# Altium PCB DC_DC.PcbDoc
Units mm, origin at the board's own origin, x right, y up, seen from the top; angles counter-clockwise.
Board outline 97.66 x 51.56 mm, 2 copper layers (Top Layer, Bottom Layer); 23 components, 9 nets, 55 pads, 2 vias.
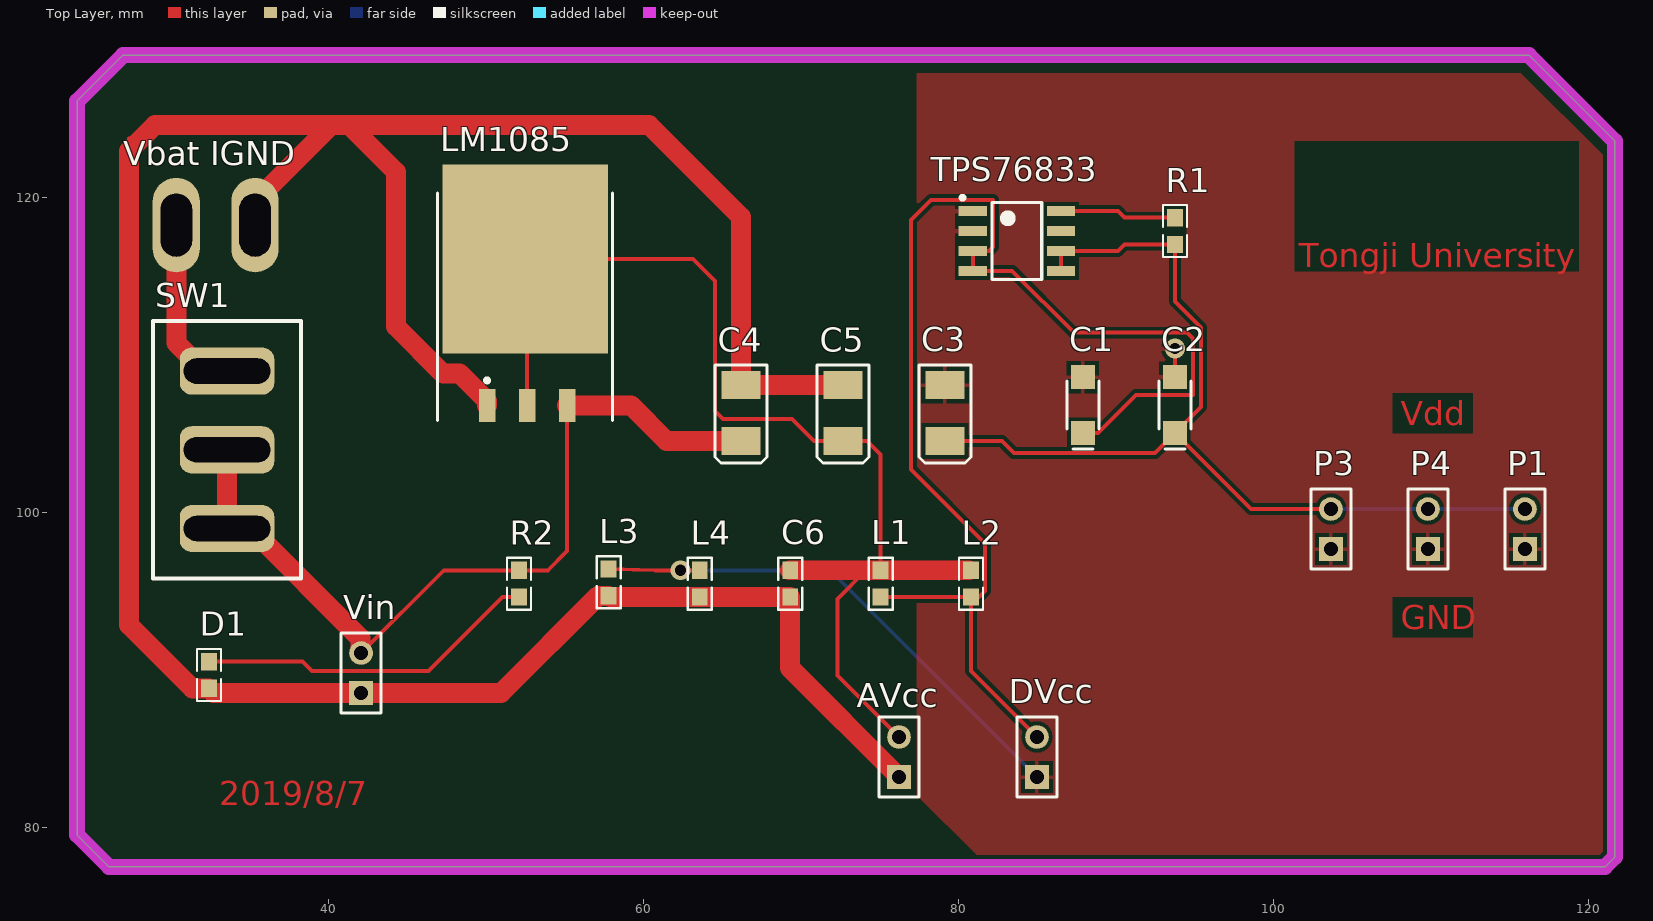
[diagram p0: Top Layer view]
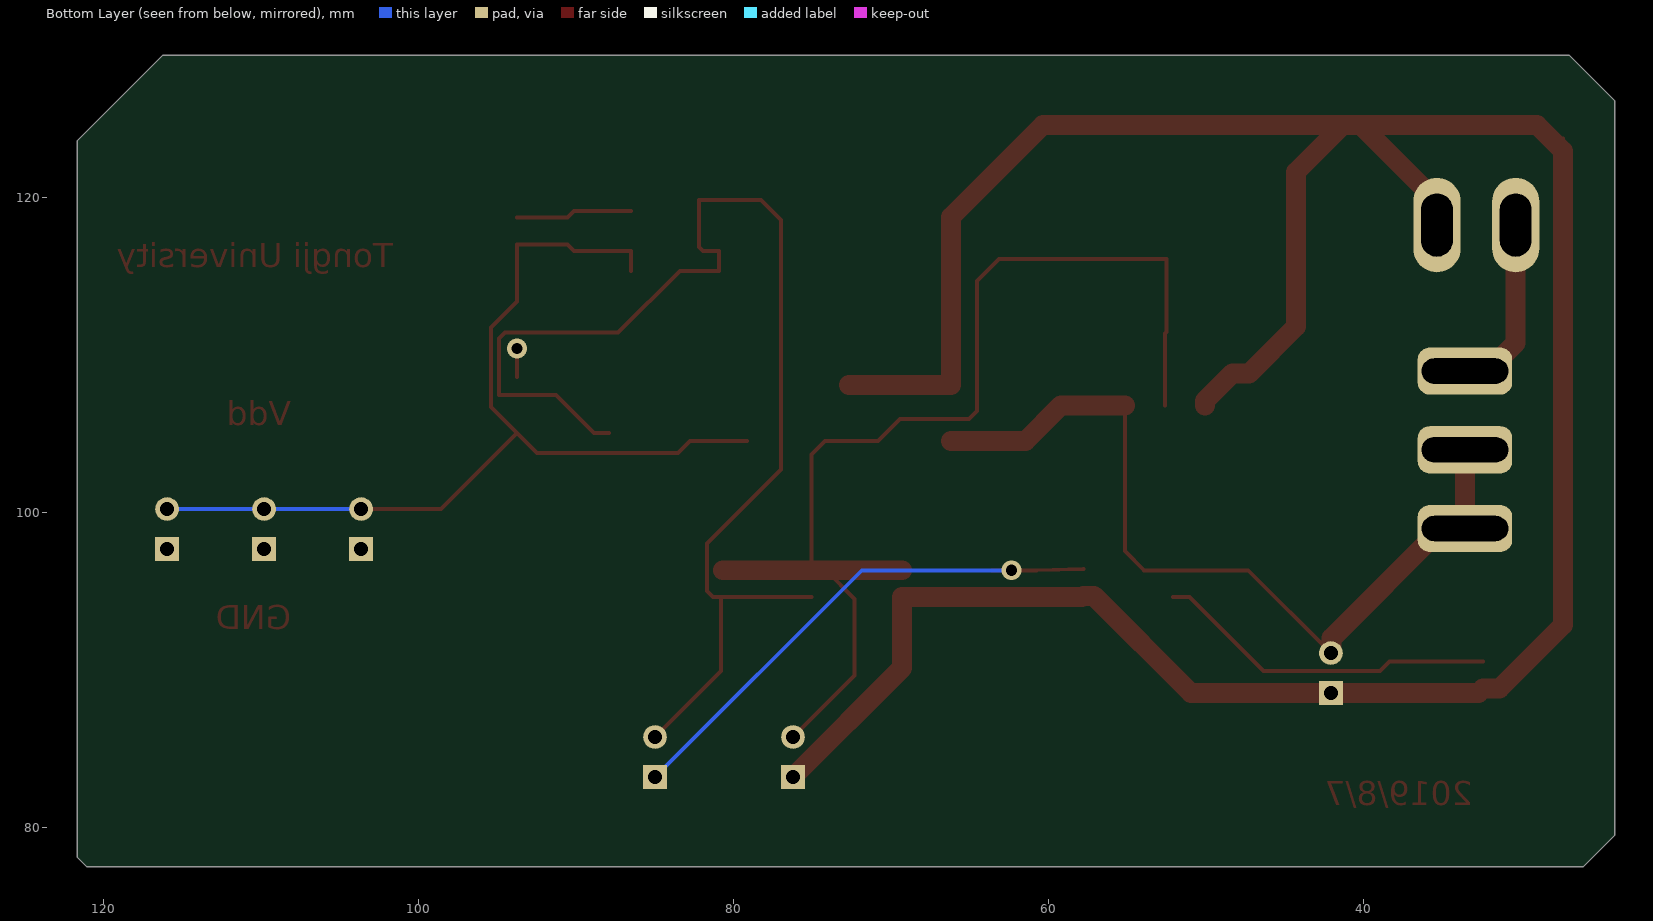
[diagram p1: Bottom Layer view, seen from below]

## Layer stack, top to bottom
Top Solder: solder mask 0.0102, Solder Resist, Dk 3.5
Top Layer: signal copper 0.0356
Dielectric 1: dielectric 0.32, FR-4, Dk 4.8
Bottom Layer: signal copper 0.0356
Bottom Solder: solder mask 0.0102, Solder Resist, Dk 3.5

## Board outline
26.035,77.47 24.003,79.502 24.003,126.111 26.924,129.032 116.205,129.032 121.666,123.571 121.666,78.105 121.031,77.47

## Design rules (kind name [scope] priority, off if disabled: settings)
Clearance [All] p1: gap=0.254 ignorepadtopadclearanceinfootprint=FALSE except(0: Arc-Hole Track-Hole SMDPad-Hole THPad-Hole Via-Hole Fill-Hole Poly-Hole Region-Hole Text-Hole)
PolygonConnect [All] p1: connectstyle=Relief reliefconductorwidth=0.254 reliefentries=4 polygonreliefangle="90 Angle" airgapwidth=0.254
RoutingVias [All] p1: holewidth=0.711 width=1.27 viastyle="Through Hole" minholewidth=0.711 minwidth=1.27 maxholewidth=0.711 maxwidth=1.27
SolderMaskExpansion [All] p1: expansion=0.102
Width [All] p1: maxlimit=2.54 minlimit=0.254 preferedwidth=0.254
30 further rules are at their usual default settings.

## Components (designator, comment, footprint, x,y, rotation, side; value= is the part's Value field where it differs from the comment)
AVcc "Analog" HDR1X2 76.2,83.185 r90 top (schematic designator P6)
C1 "10uF/16V" CAP-1206 87.884,106.805 r90 top value=10uF
C2 "0.1uF/16V" CAP-1206 93.726,106.805 r90 top value=0.1uF
C3 "CT-22uF/16V" CAP-3528 79.121,106.299 r90 top
C4 "CT-22uF/16V" CAP-3528 66.167,106.299 r90 top
C5 "CT-22uF/16V" CAP-3528 72.644,106.299 r90 top
C6 "C-0.1uF/16V" 0603-1 69.291,95.465 r90 top value=100nF
D1 "D-LED" 0603-1 32.385,89.662 r270 top
DVcc "Digital" HDR1X2 84.963,83.185 r90 top (schematic designator P5)
L1 "L-MB" 0603-1 75.032,95.465 r90 top
L2 "L-MB" 0603-1 80.772,95.465 r90 top
L3 "L-MB" 0603-1 57.76,95.543 r270 top
L4 "L-MB" 0603-1 63.551,95.465 r270 top
LM1085 "U-LM1085" TO263-3 52.578,110.998 r0 top (schematic designator U2)
P1 "Header 2" HDR1X2 115.951,97.663 r90 top
P3 "Header 2" HDR1X2 103.632,97.663 r90 top
P4 "Header 2" HDR1X2 109.791,97.663 r90 top
R1 "249k" 0603-1 93.726,117.856 r270 top value=1K
R2 "R-4.7K" 0603-1 52.07,95.465 r90 top value=4K7
SW1 "SW-POWER" SWITCH_A4 33.528,108.966 r270 top
TPS76833 "U-TPS76833QD" SOIC8 83.687,117.221 r0 top (schematic designator U1)
"Vbat IGND" "T-POWER" PWR_HDR 30.306,118.237 r90 top (schematic designator T1)
Vin "V in" HDR1X2 42.037,88.519 r90 top (schematic designator P7)

## Footprints (in the part's own frame and the unit in brackets; to place one, negate y for a bottom-side part, rotate by r counter-clockwise, add the part's x,y. Pads: shape width x height; smd on the part's side, far side on the other; paste and mask are expansions set on the pad)
0603-1 [mm] "0603带丝印"
  rect 1.1x1 smd: 1(-0.85,0) 2(0.85,0)
  silkscreen extent -1.65,-0.76 1.65,0.76, body extent -0.8,-0.4 0.8,0.4, height 0.3
CAP-1206 [mil] "钽电容"
  rect 60x60 smd: 1(-70,0) 2(70,0)
  silkscreen extent -110,-40 60,40, body extent -65,-35 65,35, height 39
CAP-3528 [mm] "钽电容"
  rect 1.8x2.5 smd: 1(-1.778,0) 2(1.778,0)
  silkscreen extent -3.17,-1.65 3.05,1.65, body extent -1.91,-1.4 1.91,1.4, height 1.1
HDR1X2 [mm] "Connector; Header; 2 Position"
  rect 1.5x1.5 hole 0.9: 1(0,0)
  round 1.5 hole 0.9: 2(2.54,0)
  silkscreen extent -1.27,-1.27 3.81,1.27
PWR_HDR [mm]
  oval 6x3 hole 2 slot 4 at 0 deg: 1(0,0) 2(0,-5)
SOIC8 [mm] "SOIC,1.27mm pitch;8 pin,3.90mm W X 4.88mm L X 1.73mm H body"
  rect 1.8x0.65 smd: 1(-2.8,1.905) 2(-2.8,0.635) 3(-2.8,-0.635) 4(-2.8,-1.905) 5(2.8,-1.905) 6(2.8,-0.635) 7(2.8,0.635) 8(2.8,1.905)
  silkscreen extent -3.57,-2.45 1.58,2.87, body extent -3.11,-2.45 3.11,2.45, height 1.75
SWITCH_A4 [mm]
  rrect50% 3x6 hole 1.6 slot 5.5 at 90 deg: 1(0,0) 2(5,0) 3(10,0)
  silkscreen extent -3.18,-4.7 13.17,4.7
TO263-3 [mm] "LM2940/LM1086"
  rect 1.05x2.1 smd: 1(-2.54,-4.225) 2(0,-4.225) 3(2.54,-4.225)
  rect 10.5x12 smd: 2(-0.104,5.08)
  silkscreen extent -5.68,-5.17 5.42,9.28, body extent -5.46,-4.7 5.21,9.27, height 1.6

## Part data
AVcc DVcc Vin: library part "Header 2", "Header, 2-Pin", LatestRevisionDate=17-Jul-2002, LatestRevisionNote="Re-released for DXP Platform.", Publisher="Altium Limited"
C1 C2: library part "Cap Pol2", "Polarized Capacitor (Axial)", LatestRevisionDate=17-Jul-2002, LatestRevisionNote="Re-released for DXP Platform.", PackageDescription="Polarized Capacitor; 2 Leads", PackageReference=POLAR0.8, Published=8-Jun-2000, Publisher="Altium Limited"
C3 C4 C5: library part Cap-Pol-A, "钽电容", Comment_1=Cap-Pol, LatestRevisionDate=17-Jul-2002, LatestRevisionNote="Re-released for DXP Platform.", PackageReference=RB7.6-15, Published=8-Jun-2000, Publisher="Altium Limited"
C6: library part Cap, "Capacitor", LatestRevisionDate=17-Jul-2002, LatestRevisionNote="Re-released for DXP Platform.", PackageDescription="Radial Cap, Thru-Hole; 2 Leads; 0.3 in Pin Spacing", PackageReference=RAD-0.3, Published=8-Jun-2000, Publisher="Altium Limited"
D1: library part LED2, "Typical RED, GREEN, YELLOW, AMBER GaAs LED", LatestRevisionDate=17-Jul-2002, LatestRevisionNote="Re-released for DXP Platform.", PackageReference=3.2X1.6X1.1, PackageVersion=Feb-2002, Published=8-Jun-2000, Publisher="Altium Limited"
L1 L2 L3 L4 R2: library part Res2, "Resistor", LatestRevisionDate=17-Jul-2002, LatestRevisionNote="Re-released for DXP Platform.", PackageReference=AXIAL-0.4, Published=8-Jun-2000, Publisher="Altium Limited"
  R2: PackageDescription="Axial Device, Thru-Hole; 2 Leads; 0.4 in Pin Spacing"
LM1085: library part LM1085
P1 P3 P4: "Header, 2-Pin", LatestRevisionDate=17-Jul-2002, LatestRevisionNote="Re-released for DXP Platform.", Publisher="Altium Limited"
R1: library part Res3, "Resistor", LatestRevisionDate=29-May-2009, LatestRevisionNote="IPC-7351 Footprint Added.", PackageDescription="Chip Resistor", PackageReference=J1-0603, Published=8-Jun-2000, Publisher="Altium Limited"
SW1: library part 大三端电源开关
TPS76833: library part TPS76850
"Vbat IGND": library part PWR_HDR

## Via types
v1: diameter 1.27, hole 0.711, Top Layer to Bottom Layer, 2 vias

## Nets (pads, with @x,y where several pads share a name; then routed paths per layer and width w, separated by ;. In a path a pad name is that pad's centre, name@x,y a point inside that pad or via, vN(x,y) a via of type N, cw(c..) or ccw(c..) an arc to the next point about the centre after c; other vN are vias at no path point)
DC+3.3V: C2.1 C3.1 P1.2 P3.2 P4.2 R1.2 TPS76833.5 TPS76833.6 | length 61.7
  Top Layer w0.254: C3.1 82.728,104.521 83.49,103.759 92.458,103.759 C2.1 ; TPS76833.5 TPS76833.6 90.094,116.586 90.514,117.006 R1.2 93.726,113.386 95.377,111.735 95.377,106.678 C2.1 ; P3.2 98.55,100.203 C2.1
  Bottom Layer w0.254: P3.2 P4.2 P1.2
DC+5V: C1.1 DVcc.2 L1.1 L2.1 TPS76833.3 TPS76833.4 | length 81.6
  Top Layer w0.254: L1.1 L2.1 ; DVcc.2 80.772,89.916 L2.1 ; C1.1 88.849,105.027 91.262,107.44 94.869,107.44 94.869,111.023 94.488,111.404 87.3,111.404 83.388,115.316 TPS76833.4 TPS76833.3 81.915,116.586 82.169,116.84 82.169,119.837 78.232,119.837 76.962,118.567 76.962,102.718 81.661,98.019 81.661,94.996 81.28,94.615 L2.1
DC+5V_ANALOG: AVcc.2 C5.1 C6.2 L1.2 L2.2 LM1085.2 | length 74.6
  Top Layer w0.254: LM1085.2@52.578,106.773 52.578,111.354 52.474,111.458 52.474,116.078 63.119,116.078 64.516,114.681 64.516,106.426 65.024,105.918 69.418,105.918 70.815,104.521 C5.1 74.168,104.521 75.032,103.657 L1.2 74.115,96.315 72.288,94.488 72.288,89.637 AVcc.2 ; L2.2@80.645,96.315 L2.2
  Top Layer w1.27: C6.2 L1.2 L2.2@80.645,96.315
GND: C1.2 C2.2 C3.2 DVcc.1 L3.1 L4.1 P1.1 P3.1 P4.1 TPS76833.1 TPS76833.2 | length 35.7
  Top Layer w0.254: L3.1 60.733,96.315 v1(62.33,96.315) L4.1 ; C2.2 v1(93.726,110.388)
  Bottom Layer w0.254: v1(62.33,96.315) 71.833,96.315 DVcc.1
IGND: "Vbat IGND.2" AVcc.1 C4.2 C5.2 C6.1 D1.2 L3.2 L4.2 LM1085.1 Vin.1 | length 260.5
  Top Layer w0.254: 27.305,123.749 27.305,122.936 27.305,92.837 31.33,88.812 31.623,88.519 32.678,88.519 Vin.1 50.927,88.519 ; L3.2@58.166,94.615 L4.2 ; 60.325,124.587 66.167,118.745 C4.2
  Top Layer w1.27: D1.2 31.33,88.812 27.305,92.837 27.305,122.936 28.956,124.587 40.156,124.587 ; D1.2@32.678,88.519 Vin.1 50.927,88.519 57.101,94.693 L3.2 57.838,94.615 L4.2 C6.1 69.291,90.094 AVcc.1 ; 35.306,118.237 35.306,119.737 40.156,124.587 ; LM1085.1 50.038,107.078 48.304,108.812 47.233,108.812 44.254,111.791 44.254,121.608 41.275,124.587 ; C5.2 C4.2 66.167,118.745 60.325,124.587 41.275,124.587 ; 40.156,124.587 41.275,124.587
NetD1_1: D1.1 R2.1 | length 21.9
  Top Layer w0.254: D1.1 38.317,90.512 38.913,89.916 46.33,89.916 51.029,94.615 R2.1
NetR1_1: R1.1 TPS76833.8 | length 7.4
  Top Layer w0.254: TPS76833.8 90.094,119.126 90.514,118.706 R1.1
VBAT: "Vbat IGND.1" SW1.1 | length 11.4
  Top Layer w1.27: 30.306,118.237 30.306,110.75 32.09,108.966 SW1.1
VCC_RAW: C4.1 LM1085.3 R2.2 SW1.2 SW1.3 Vin.2 | length 54.3
  Top Layer w0.254: Vin.2 47.293,96.315 R2.2 53.897,96.315 55.118,97.536 LM1085.3
  Top Layer w1.27: SW1.2 SW1.3 35.028,98.966 41.993,92.001 41.993,91.103 Vin.2 ; LM1085.3 59.189,106.773 61.441,104.521 C4.1
pads on no net: TPS76833.7

## Polygon pours and split planes (outlines as drawn)
GND on Top Layer "GND_L01_P028" (solid, remove dead copper, pour order 28): 77.343,127.889 115.697,127.889 121.031,122.555 121.031,78.232 81.153,78.232 77.343,82.042
GND on Top Layer "GND_L01_P026" (solid, remove dead copper, pour order 26): 76.581,125.222
GND on Top Layer "GND_L01_P018" (solid, remove dead copper, pour order 18): 129.413,97.282
GND on Top Layer "GND_L01_P014" (solid, remove dead copper, pour order 14): 67.437,127
GND on Top Layer "GND_L01_P012" (solid, remove dead copper, pour order 12): 60.452,127.254
no net on Top Layer "NONET_L01_P002" (solid, remove dead copper, pour order 2): 27.051,126.365

## Keep-outs
Top Layer:
  the board outline again, w1.016

## Other copper
Top Layer:
  text "Tongji University" at 101.6,115.57 h1.52
  text "Vdd" at 108.077,105.537 h1.52
  text "GND" at 108.077,92.583 h1.52
  text "2019/8/7" at 33.02,81.407 h1.52